# EAGLE board qo-100-pa-merged (EAGLE 9.6.1)
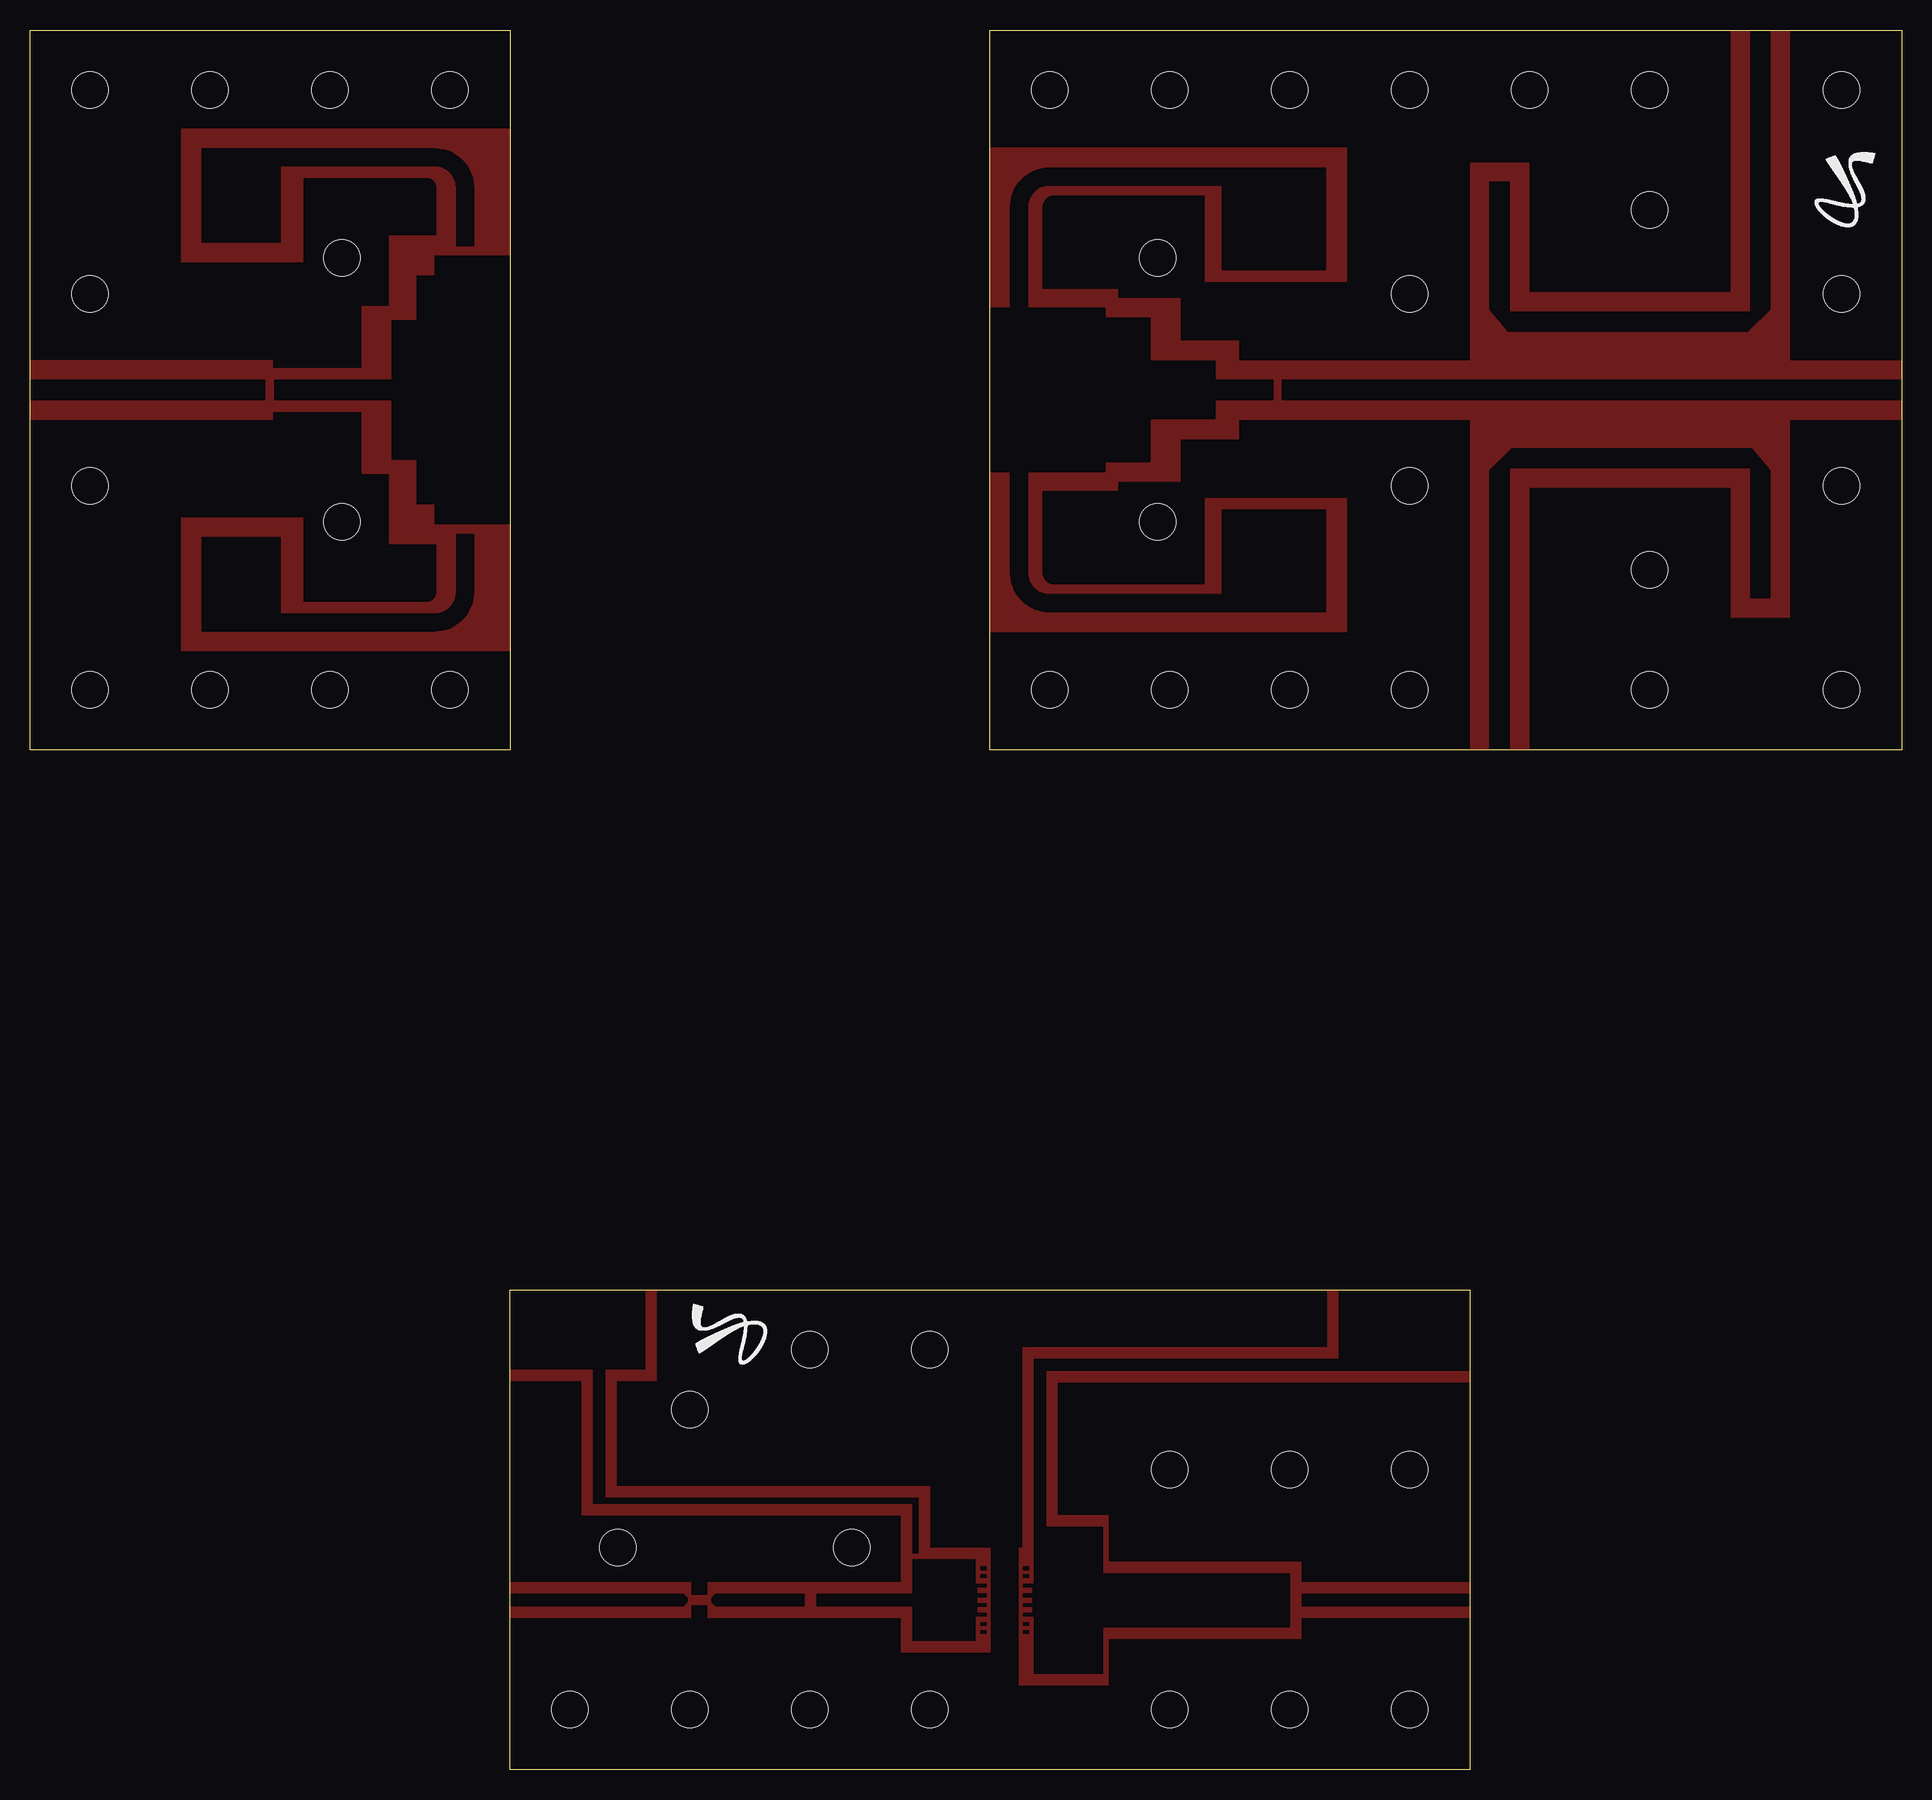
[diagram p0: board, top side]

Size 156 x 145 mm. Coordinates in mm from the lower left corner, seen from the top.
Outline: 40,0 40,40 120,40 120,0 40,0
Outline: 0,85 0,145 40,145 40,85 0,85
Outline: 80,85 80,145 156,145 156,85 80,85
Copper layers (1*16): Top 0.035mm / dielectric 0.15mm / Bottom 0.035mm
Design rules "default *": minimum track width 6mil, minimum drill 0.35mm, track to track 6mil, track to pad 6mil, pad to pad 6mil, via to via 6mil, smd to smd 6mil, copper to edge 0mil, drill to drill 6mil, minimum pad ring 10mil, minimum via ring 8mil, stop-mask expansion 4mil, vias tented up to drill 0mil, thermal gap 10mil
Holes 3 mm at 45,5 55,5 65,5 75,5 105,5 105,25 95,25 75,35 65,35 55,30 68.5,18.5 49,18.5 115,5 115,25 95,5 5,90 15,90 25,90 35,90 5,140 15,140 25,140 35,140 26,126 5,123 5,107 26,104 85,140 95,140 105,140 115,140 85,90 95,90 105,90 115,90 115,123 115,107 94,104 94,126 151,140 151,90 151,123 151,107 135,90 125,140 135,140 135,100 135,130

## Placement (x,y rotation side)
E$1  [JS_5MM]  55,39 90 top
E$2  [JS_5MM]  154,135 0 top

## Library data of the parts
E$1 E$2 = Silkscreen

## Tracks (layer width: path | path; a pad name or v marks a point on that pad's centre or on a via)
BIAS
  cutout Top: 14.32,102.73 14.32,94.86 33.74,94.86 arc90 37,98.12 37,103 35.5,103 35.5,98.12 arc-90 33.74,96.36 20.9,96.36 20.9,102.73
  cutout Top: 83.2,121.86 83.2,130.26 arc-90 84.96,132.02 99.33,132.02 99.33,124.98 108,124.98 108,133.52 84.96,133.52 arc90 81.7,130.26 81.7,121.86
BIAS1
  cutout Top: 73.54,18 73.54,22.13 46.95,22.13 46.95,33.33 40,33.33 40,40 51.27,40 51.27,33.33 47.95,33.33 47.95,22.63 74.04,22.63 74.04,18
BIAS2
  cutout Top: 83.71,20.24 83.71,34.21 109.09,34.21 109.09,40 120,40 120,33.21 84.71,33.21 84.71,20.24
BIAS3
  cutout Top: 14.32,127.27 14.32,135.14 33.74,135.14 arc-90 37,131.88 37,127 35.5,127 35.5,131.88 arc90 33.74,133.64 20.9,133.64 20.9,127.27
BIAS4
  cutout Top: 83.2,108.14 83.2,99.74 arc90 84.96,97.98 99.33,97.98 99.33,105.02 108,105.02 108,96.48 84.96,96.48 arc-90 81.7,99.74 81.7,108.14
DRAIN
  cutout Top: 80,108.14 89.66,108.14 89.66,109 93.4,109 93.4,112.58 98.8,112.58 98.8,114.16 103.63,114.16 103.63,115.84 98.8,115.84 98.8,117.42 93.4,117.42 93.4,121 89.66,121 89.66,121.86 80,121.86
FWD
  cutout Top: 121.66,85 121.66,108.3 123.52,110.16 143.52,110.16 145.05,108.3 145.05,97.66 143.38,97.66 143.38,108.48 123.34,108.48 123.34,85
FWD1
  cutout Top: 145.05,145 145.05,121.7 143.2,119.84 123.2,119.84 121.66,121.7 121.66,132.34 123.34,132.34 123.34,121.52 143.38,121.52 143.38,145
GATE
  cutout Top: 65.54,13.59 73.54,13.59 73.54,10.75 78.79,10.75 78.79,12.77 79.74,12.77 79.74,13.07 78.94,13.07 78.94,13.57 79.74,13.57 79.74,13.87 78.94,13.87 78.94,14.37 79.74,14.37 79.74,14.67 78.94,14.67 78.94,15.17 79.74,15.17 79.74,15.47 78.79,15.47 78.79,17.5 73.54,17.5 73.54,14.66 65.54,14.66
GATE1
  cutout Top: 105,16.37 105,11.87 89.46,11.87 89.46,7.99 83.71,7.99 83.71,12.77 82.76,12.77 82.76,13.07 83.56,13.07 83.56,13.57 82.76,13.57 82.76,13.87 83.56,13.87 83.56,14.37 82.76,14.37 82.76,14.67 83.56,14.67 83.56,15.17 82.76,15.17 82.76,15.47 83.71,15.47 83.71,20.24 89.46,20.24 89.46,16.37
GATE2
  cutout Top: 20.34,114.16 30.12,114.16 30.12,109.2 32.22,109.2 32.22,105.47 33.73,105.47 33.73,103.79 40,103.79 40,126.21 33.73,126.21 33.73,124.53 32.22,124.53 32.22,120.8 30.12,120.8 30.12,115.84 20.34,115.84
GN
  cutout Top: 56.45,13.7 56.45,12.59 55.15,12.59 55.15,13.7
GN1
  cutout Top: 55.15,14.55 55.15,15.66 56.45,15.66 56.45,14.55
GND
  cutout Top: 40,15.66 72.54,15.66 72.54,21.13 45.95,21.13 45.95,32.33 40,32.33
  cutout Top: 40,0 120,0 120,12.59 106,12.59 106,10.87 89.96,10.87 89.96,6.99 82.4,6.99 82.4,18.5 82.71,18.5 82.71,35.21 108.09,35.21 108.09,40 52.27,40 52.27,32.33 48.95,32.33 48.95,23.63 75.04,23.63 75.04,18.5 80.1,18.5 80.1,9.75 72.54,9.75 72.54,12.59 40,12.59
  cutout Top: 120,15.66 106,15.66 106,17.37 89.96,17.37 89.96,21.24 85.71,21.24 85.71,32.21 120,32.21
GND1
  cutout Top: 0,117.51 0,145 40,145 40,136.81 12.57,136.81 12.57,125.59 22.8,125.59 22.8,132.64 33.09,132.64 arc-90 33.85,131.88 33.85,127.89 29.89,127.89 29.89,122 27.62,122 27.62,116.84 20.25,116.84 20.25,117.51
  cutout Top: 0,112.49 0,85 40,85 40,93.19 12.57,93.19 12.57,104.41 22.8,104.41 22.8,97.36 33.09,97.36 arc90 33.85,98.12 33.85,102.11 29.89,102.11 29.89,108 27.62,108 27.62,113.16 20.25,113.16 20.25,112.49
  cutout Top: 80,85 120,85 120,112.5 100.83,112.5 100.83,110.84 95.95,110.84 95.95,107.32 90.73,107.32 90.73,106.56 84.4,106.56 84.4,99.79 arc90 85.4,98.79 97.9,98.79 97.9,106 109.8,106 109.8,94.78 80,94.78
  cutout Top: 125,85 125,106.82 141.72,106.82 141.72,96 146.72,96 146.72,112.5 156,112.5 156,85
  cutout Top: 156,117.5 146.72,117.5 146.72,135 146.72,145 156,145
GND2
  cutout Top: 80,145 141.72,145 141.72,123.18 125,123.18 125,134 120,134 120,117.5 100.83,117.5 100.83,119.16 95.95,119.16 95.95,122.68 90.73,122.68 90.73,123.44 84.4,123.44 84.4,130.21 arc-90 85.4,131.21 97.9,131.21 97.9,124 109.8,124 109.8,135.22 80,135.22
IN
  cutout Top: 40,14.66 40,13.59 54.47,13.59 54.82,13.94 54.82,14.31 54.47,14.66
IN1
  cutout Top: 64.54,14.66 57.15,14.66 56.8,14.31 56.8,13.94 57.15,13.59 64.54,13.59
IN2
  cutout Top: 106,14.66 106,13.59 120,13.59 120,14.66
IN3
  cutout Top: 0,115.84 0,114.16 19.62,114.16 19.62,115.84
IN4
  cutout Top: 156,114.16 156,115.84 104.36,115.84 104.36,114.16
NEGATIVE
  pour Top: 40,0 120,0 120,40 40,40
NEGATIVE1
  pour Top: 0,85 40,85 40,145 0,145
  pour Top: 80,85 80,145 156,145 156,85
PAD
  cutout Top: 79.74,15.97 79.74,16.27 79.24,16.27 79.24,15.97
PAD1
  cutout Top: 79.74,11.97 79.74,12.27 79.24,12.27 79.24,11.97
PAD2
  cutout Top: 79.74,16.62 79.74,16.92 79.24,16.92 79.24,16.62
PAD3
  cutout Top: 79.74,11.32 79.74,11.62 79.24,11.62 79.24,11.32
PAD4
  cutout Top: 83.26,15.97 83.26,16.27 82.76,16.27 82.76,15.97
PAD5
  cutout Top: 83.26,11.97 83.26,12.27 82.76,12.27 82.76,11.97
PAD6
  cutout Top: 83.26,16.62 83.26,16.92 82.76,16.92 82.76,16.62
PAD7
  cutout Top: 83.26,11.32 83.26,11.62 82.76,11.62 82.76,11.32